# Altium PCB PCB.PcbDoc
Units mm, origin at the board's own origin, x right, y up, seen from the top; angles counter-clockwise.
Board outline 21 x 24 mm, 2 copper layers (Top Layer, Bottom Layer), stack 0.96 mm thick; 17 components, 13 nets, 56 pads, 22 vias.
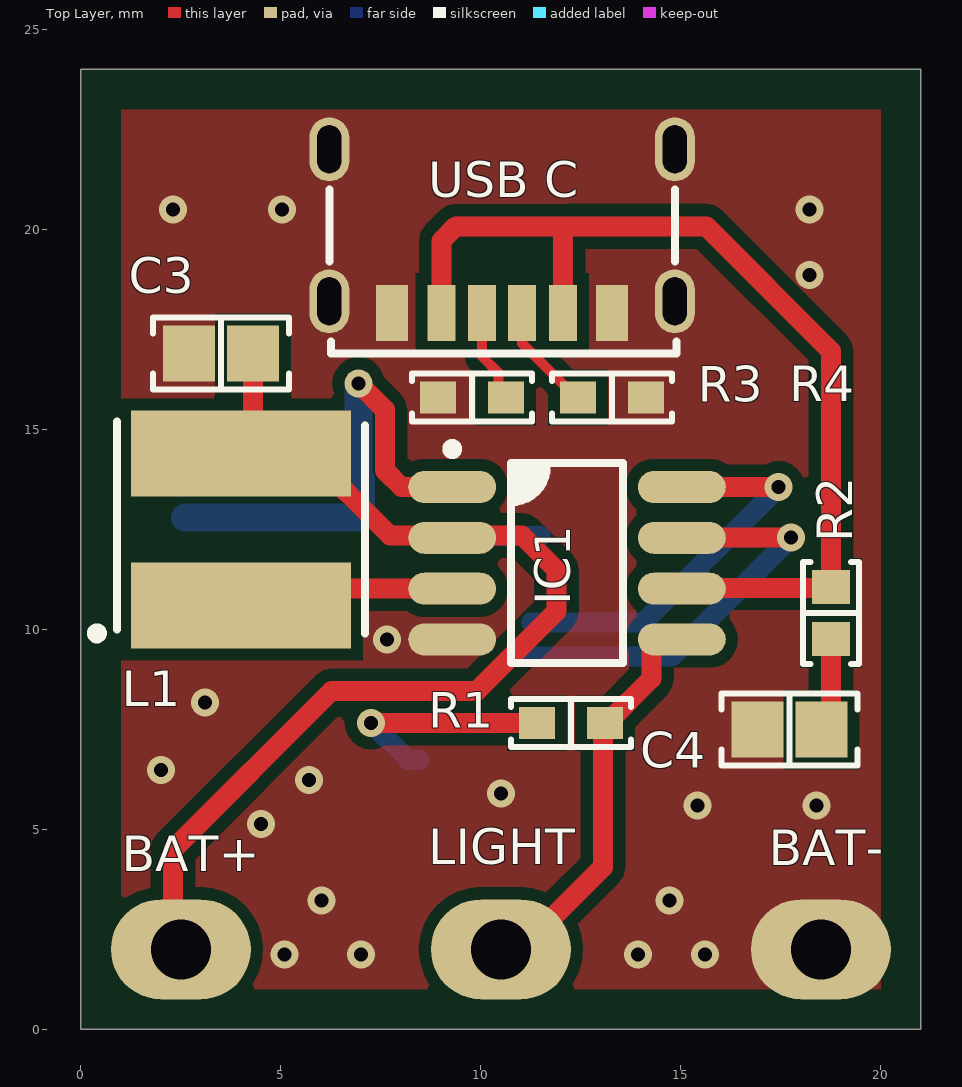
[diagram p0: Top Layer view]
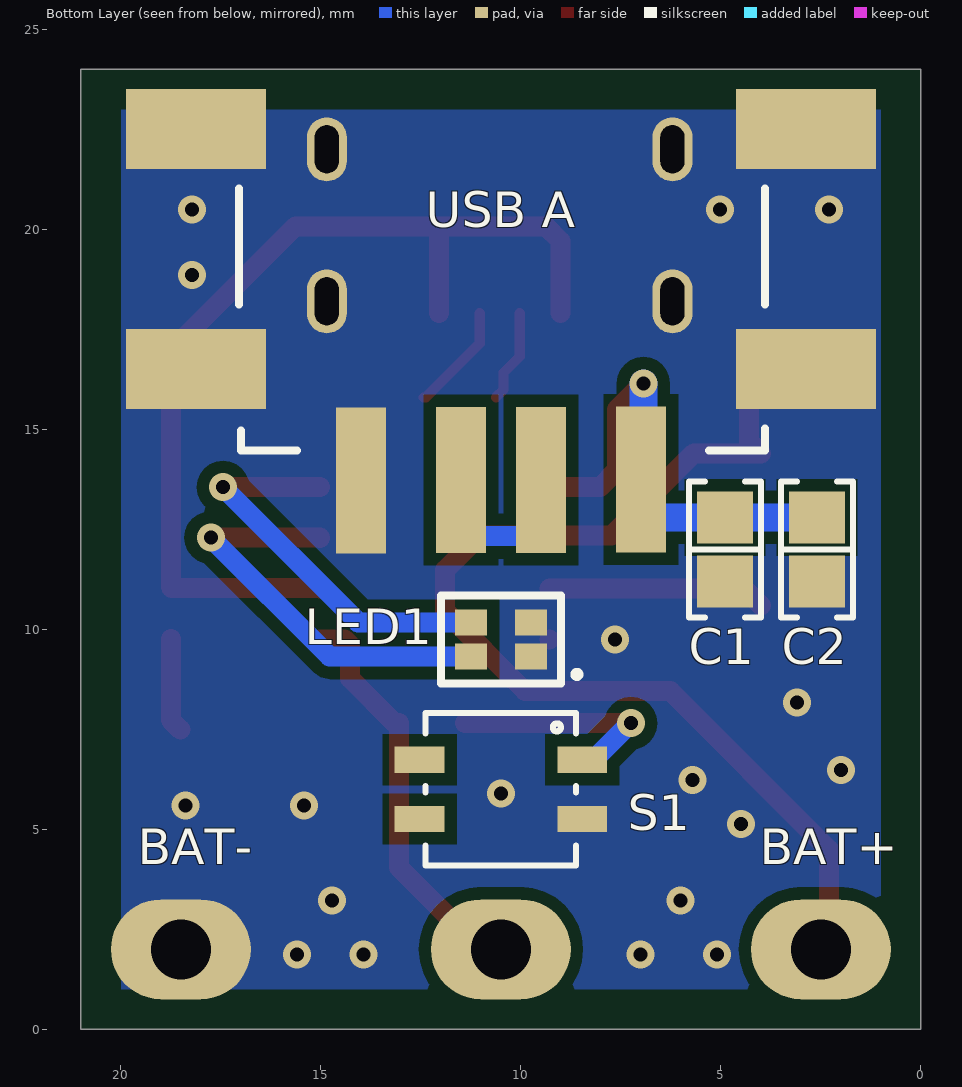
[diagram p1: Bottom Layer view, seen from below]
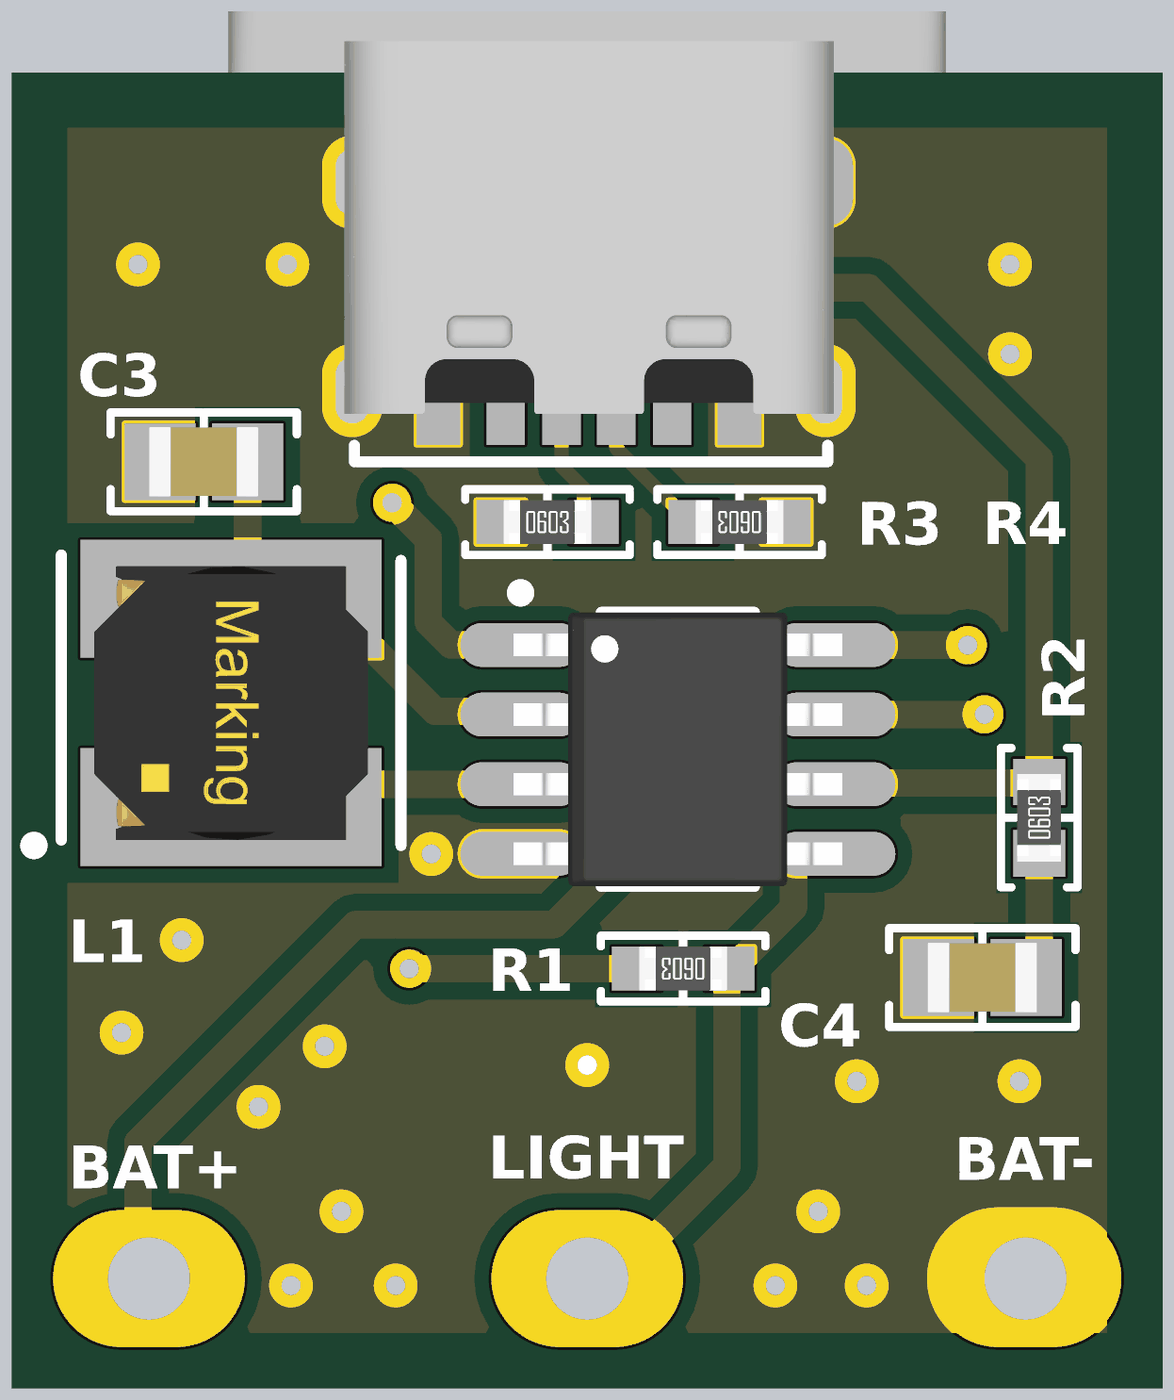
[diagram p2: 3D render of the assembled board from above, using the file's embedded part models]
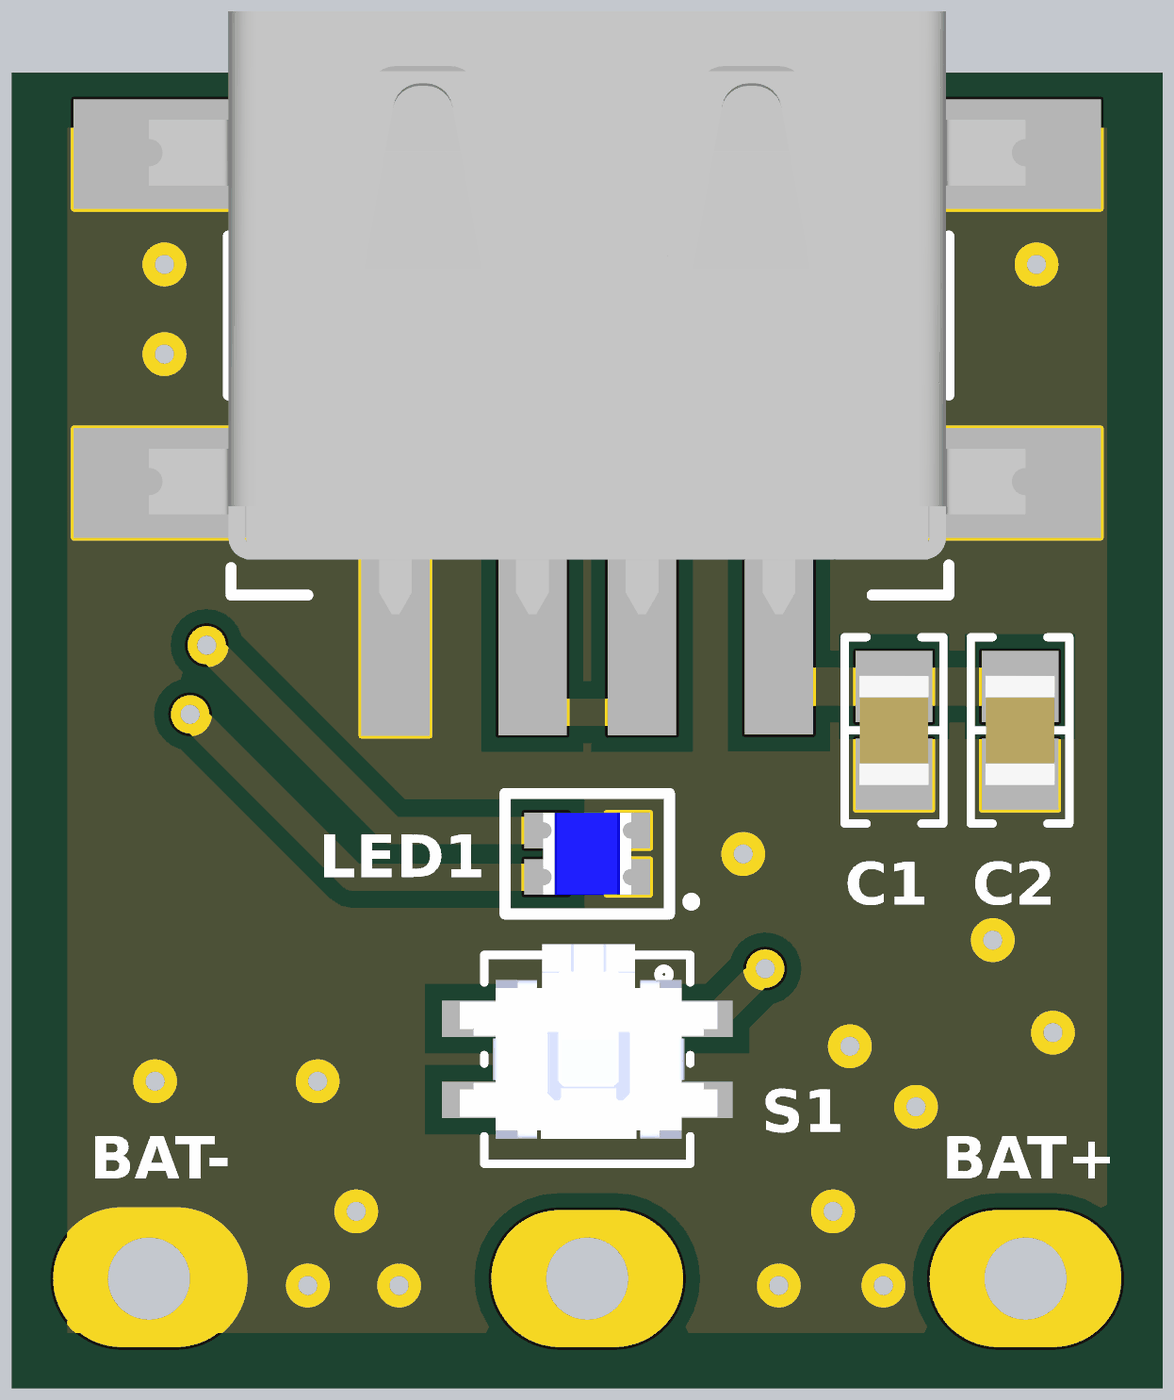
[diagram p3: 3D render of the assembled board from below, using the file's embedded part models]

## Layer stack, top to bottom
Top Solder: solder mask 0.02, Solder Resist, Dk 3.5
Top Layer: signal copper 0.03
Dielectric 1: dielectric 0.9, FR-4, Dk 4.8
Bottom Layer: signal copper 0.03
Bottom Solder: solder mask 0.02, Solder Resist, Dk 3.5

## Board outline
0,0 0,24 21,24 21,0

## Design rules (kind name [scope] priority, off if disabled: settings)
AcuteAngle [All] p1: minimum=6.00000000000000E+0001 checktracksonly=TRUE
AssemblyTestPointUsage [(not InNetClass('NOTESTPOINTS'))] p1: allowmultiple=TRUE
AssemblyTestPointUsage AssemblyTestPointUsageN [InNetClass('NOTESTPOINTS')] p2: valid=2 allowmultiple=TRUE
AssemblyTestpoint [All] p1: testpointundercomponent=TRUE minsize=0.8 maxsize=2 preferedsize=1 minholesize=0 maxholesize=0.35 preferedholesize=0 testpointgrid=1.27 usegrid=FALSE gridoriginx=87.5 gridoriginy=62.5 gridtolerance=0 allowsidetop=TRUE minspacing=2.54 // Zollner
BoardOutlineClearance BoardCopperOutlineClearance [(OnLayer('Top Layer') OR OnLayer('Bottom Layer') )] p1: gap=0.5 ignorepadtopadclearanceinfootprint=FALSE except(1: Poly-OutlineEdge Region-OutlineEdge; 1.5: SMDPad-OutlineEdge THPad-OutlineEdge)
Clearance PadToViaClearance [IsVia and not IsComponentVia vs IsPad] p1: gap=0.025 ignorepadtopadclearanceinfootprint=TRUE
Clearance "Clearance NOTSELV-SELV" [InNetClass('NOTSELV') vs NOT InNetClass('NOTSELV')] p2: gap=6 ignorepadtopadclearanceinfootprint=FALSE // according to previous calio PCB
Clearance "Clearance (FAB)" [All] p3: gap=0.203 ignorepadtopadclearanceinfootprint=TRUE except(0.305: Arc-Poly Track-Poly SMDPad-Poly THPad-Poly Via-Poly Fill-Poly Poly-Poly)
ComponentClearance ComponentClearance_NetTie [((ObjectKind = 'Component') And (ComponentType = 'Net Tie')) Or (Footprint = 'StarPoint') Or (Footprint like 'NetTieVia*')] p1: gap=-3.81 collisioncheckmode=3 verticalgap=-3.81 showdistances=FALSE
ComponentClearance [All] p2: gap=0.254 collisioncheckmode=3 verticalgap=0.254 showdistances=FALSE
DiffPairsRouting [All] p1: maxlimit=1.27 minlimit=0.203 mostfreqgap=0.203 toplayer_minwidth=0.152 toplayer_maxwidth=2.54 toplayer_prefwidth=0.254 bottomlayer_minwidth=0.152 bottomlayer_maxwidth=2.54 bottomlayer_prefwidth=0.254 maxuncoupledlength=12.7
FabricationTestPointUsage [All] p1: valid=2 allowmultiple=FALSE
FabricationTestpoint [All] p1: side=3 testpointundercomponent=TRUE minsize=1.016 maxsize=2.54 preferedsize=1.524 minholesize=0 maxholesize=1.016 preferedholesize=0.813 testpointgrid=0.025 allowsidetop=TRUE allowsidebottom=TRUE usegrid=FALSE gridtolerance=0
HoleSize [All] p1: absolutevalues=TRUE maxlimit=6.35 minlimit=0.3 maxpercent=80.000 minpercent=20.000 // Zollner
HoleToHoleClearance HoleToHoleClearance_NetTieVia [InPadClass('NetTieVias') vs InPadClass('NetTieVias')] p1: gap=0 allowstackedmicrovias=TRUE
HoleToHoleClearance [All] p2: gap=0.25 allowstackedmicrovias=TRUE // Zollner
MinimumAnnularRing [All] p1: minimumring=0.15 // PCBWAY
MinimumSolderMaskSliver [All] p1: minsoldermaskwidth=0.2 // Zollner
PlaneClearance PlaneClearance_1 [All] p1: clearance=0.508
PlaneConnect [All] p1: pad.planeconnectstyle=Relief pad.reliefexpansion=0.508 pad.reliefentries=4 pad.reliefconductorwidth=0.254 pad.reliefairgap=0.254 via.planeconnectstyle=Direct via.reliefexpansion=0.508 via.reliefentries=4 via.reliefconductorwidth=0.254 via.reliefairgap=0.254
PolygonConnect [All] p1: connectstyle=Direct reliefconductorwidth=0.254 reliefentries=4 polygonreliefangle="90 Angle" airgapwidth=0.254
RoutingVias [All] p1: holewidth=0.35 width=0.7 viastyle="Through Hole" minholewidth=0.3 minwidth=0.6 maxholewidth=1.27 maxwidth=1.27
SMDEntry [not IsTestpoint] p1: side=TRUE corner=TRUE anyangle=FALSE
SMDNeckDown [not IsTestpoint] p1: percent=90.000
SMDToCorner [All] p1: distance=10000
SMDToPlane [All] p1: distance=0
ShortCircuit [All vs not IsBoardCutoutRegion] p1: allowed=FALSE
SilkToSolderMaskClearance [IsPad] p1: minsilkscreentomaskgap=0.127 clearancetoexposedcopper=TRUE
SolderMaskExpansion [All] p1: expansion=0.05 // Zollner
SolderMaskExpansion SolderMaskExpansionToHoles [All] p2: expansion=0.1 soldermaskfromhole=TRUE // Zollner
UnRoutedNet [All] p1: checkbadconnections=TRUE
Width [All] p1: maxlimit=12.7 minlimit=0.203 preferedwidth=0.254
16 further rules are at their usual default settings.

## Components (designator, comment, footprint, x,y, rotation, side; value= is the part's Value field where it differs from the comment)
BAT+ "2.5MMx3.5MM" PAD_WITH_HOLE_2.5X3.5MM#1 2,2 r90 top locked (schematic designator J3)
BAT- "2.5MMx3.5MM" PAD_WITH_HOLE_2.5X3.5MM#2 19,2 r90 top locked (schematic designator J4)
C1 "10µF" "CAP 0805_2012" 4.9,12 r90 bottom
C2 "10µF" "CAP 0805_2012" 2.6,12 r90 bottom
C3 "10µF" "CAP 0805_2012" 3.5,16.9 r0 top
C4 "2.2µF" "CAP 0805_2012" 17.712,7.492 r0 top
IC1 "TP4333" "ALPHAOMEGA SO8 SOP-8L" 12.154,11.654 r0 top
L1 "1.5 uH" CD54 4,12.5 r270 top
LED1 "Bicolor 1615" "LED 0603 1615 BICOLOR" 10.5,9.75 r0 bottom
LIGHT "2.5MMx3.5MM" PAD_WITH_HOLE_2.5X3.5MM#3 10.5,2 r90 top locked (schematic designator J5)
R1 "10 kOhms" "YAGEO RES 0603_1608" 12.25,7.654 r180 top
R2 "1.5 Ohms" "RES 0603_1608" 18.75,10.409 r90 top
R3 "5.1 kOhms" "YAGEO RES 0603_1608" 9.775,15.8 r0 top
R4 "5.1 kOhms" "YAGEO RES 0603_1608" 13.28,15.8 r180 top
S1 "EVQ-P7A01P" EVQ-P7A01P 10.5,6 r0 bottom
"USB A" "USB A" "PCB - CONNECTOR - USB - YOURCEEAF10.0" 10.5,18.119 r0 bottom (schematic designator J2)
"USB C" "USB Type-C 6pin" USB_TYPE_C_6PIN 14.85,22 r180 top locked (schematic designator J1)

## Footprints (in the part's own frame and the unit in brackets; to place one, negate y for a bottom-side part, rotate by r counter-clockwise, add the part's x,y. Pads: shape width x height; smd on the part's side, far side on the other; paste and mask are expansions set on the pad)
"ALPHAOMEGA SO8 SOP-8L" [mm] "SOIC, 8-Leads, Body 4.90x3.90mm, Pitch 1.27mm, IPC Medium Density"
  oval 2.2x0.8 smd: 1(-2.87,1.905) 2(-2.87,0.635) 3(-2.87,-0.635) 4(-2.87,-1.905) 5(2.87,-1.905) 6(2.87,-0.635) 7(2.87,0.635) 8(2.87,1.905)
  silkscreen extent -2.99,-2.5 1.4,2.98, body extent -3,-2.5 3,2.5, height 1.75
"CAP 0805_2012" [mm] "Chip Capacitor, 2-Leads, Body 2.00x1.20mm, IPC Medium Density"
  rect 1.3x1.4 smd: 1(-0.8,0) 2(0.8,0)
  silkscreen extent -1.7,-0.9 1.7,0.9, body extent -1,-0.64 1,0.64, height 1.26
CD54 [mm] "SMD Power Inductor, 2-Leads, body 5.8x5.2mm"
  rect 2.15x5.5 smd: 1(1.9,0) 2(-1.9,0)
  silkscreen extent -2.7,-3.72 2.72,3.1, body extent -2.5,-2.5 2.5,2.5, height 4.03
EVQ-P7A01P [mil]
  rect 49x26 smd paste+0 mask+0: 2(-80,29.13) 2*(80,29.13) 3(-80,-29.13) 3*(80,-29.13)
  silkscreen extent -74,-75 74,75, body extent -94,-83 92,57, height 53
"LED 0603 1615 BICOLOR" [mm] "SMD SMT Light Emitting Diode 1.6*0.8*0.6MM"
  rect 0.8x0.65 smd mask+0.05: 1(-0.75,0.425) 2(0.75,0.425) 3(-0.75,-0.425) 4(0.75,-0.425)
  silkscreen extent -1.94,-1.1 1.5,1.1, body extent -0.8,-0.75 0.8,0.75, height 0.7
PAD_WITH_HOLE_2.5X3.5MM#1 [mm]
  rrect100% 2.5x3.5 hole 1.5: 1(0,-0.5)
PAD_WITH_HOLE_2.5X3.5MM#2 [mm]
  rrect100% 2.5x3.5 hole 1.5: 1(0,0.5)
PAD_WITH_HOLE_2.5X3.5MM#3 [mm]
  rrect100% 2.5x3.5 hole 1.5: 1(0,0)
"PCB - CONNECTOR - USB - YOURCEEAF10.0" [mm] "SMD USB Type A Female jack 4PIN"
  rect 1.25x3.65 smd: 1(-3.5,4.369) 2(-1,4.381) 3(1,4.381) 4(3.5,4.394)
  rect 3.5x2 smd: S(-7.625,-4.394) S(-7.625,1.606) S(7.625,-4.394) S(7.625,1.606)
  silkscreen extent -6.6,-2.9 6.55,3.65, body extent -8,-7 11.1,4, height 6.85
"RES 0603_1608" [mm] "Chip Resistor, 2-Leads, Body 1.60x0.80mm, IPC Medium Density"
  rect 0.85x0.95 smd: 1(-0.65,0) 2(0.65,0)
  silkscreen extent -1.27,-0.7 1.27,0.7, body extent -0.8,-0.4 0.8,0.4, height 0.45
USB_TYPE_C_6PIN [mm] "Power only USB Type-C 6pin"
  rect 0.7x1.4 smd: A5(3.82,4.09) A9(5.84,4.09) B5(4.82,4.09) B9(2.8,4.09)
  rect 0.8x1.4 smd: A12(7.07,4.09) B12(1.57,4.09)
  oval 1x1.6 hole 1.2 slot 0.6 at 0 deg: S(0,3.8) S(0,0) S(8.64,0) S(8.64,3.8)
  oval 1x1.6 smd: S(0,0)
  silkscreen extent -0.04,1 8.64,5.1, body extent -0.15,-2.57 8.79,4.23, height 3.21
"YAGEO RES 0603_1608" [mm] "Chip Resistor, 2-Leads, Body 1.60x0.80mm"
  rect 0.9x0.8 smd: 1(-0.85,0) 2(0.85,0)
  silkscreen extent -1.5,-0.6 1.5,0.6, body extent -0.8,-0.4 0.8,0.4, height 0.45

## Part data
BAT+ BAT- LIGHT: library part PAD_WITH_HOLE_2.5X3.5MM, "High: 3mm Length: 3.5mm"
C1 C2 C3: library part 0805ZD106KAT4A, "CAP CER 10UF 10V X5R 0805", Device Package="0805 (2012 Metric)", Manufacturer="AVX Corporation", Operating Temperature="-55°C ~ 85°C", Supplier Part Number 1=478-10579-1-ND, Temperature Coefficient=X5R, Tolerance=±10%, Voltage - Rated=10V, Applications="General Purpose", Capacitance=10µF, ComponentLink1Description=Datasheet, ComponentLink1URL=http://datasheets.avx.com/cx5r.pdf, ComponentLink2Description="DigiKey Link", ComponentLink2URL=http://digikey.com/product-detail/en/avx-corporation/0805ZD106KAT4A/478-10579-1-ND/6797452, id=487, LastUpdated=2020-09-02T01:04:37.257, Lifecycle Status=Active, Minimum Order=1, Mounting Type="Surface Mount, MLCC", Package / Case="0805 (2012 Metric)", Packaging=TapeAndReel, PartId=5023, Part Number=0805ZD106KAT4A, Part Status=Active, Price=0.12, Series=-, Size / Dimension="0.079\" L x 0.049\" W (2.01mm x 1.25mm)", Supplier 1=DigiKey, Thickness (Max)="0.055\" (1.40mm)"
C4: library part 0805YD225KAT2A, "CAP CER 2.2UF 16V X5R 0805", Device Package="0805 (2012 Metric)", Manufacturer="AVX Corporation", Operating Temperature="-55°C ~ 85°C", Supplier Part Number 1=478-2580-1-ND, Temperature Coefficient=X5R, Tolerance=±10%, Voltage - Rated=16V, Applications="General Purpose", Capacitance=2.2µF, ComponentLink1Description=Datasheet, ComponentLink1URL=http://datasheets.avx.com/cx5r.pdf, ComponentLink2Description="DigiKey Link", ComponentLink2URL=http://digikey.com/product-detail/en/avx-corporation/0805YD225KAT2A/478-2580-1-ND/717525, id=190, LastUpdated=2020-09-02T01:04:40.080, Lifecycle Status=Active, Minimum Order=1, Mounting Type="Surface Mount, MLCC", Package / Case="0805 (2012 Metric)", Packaging=TapeAndReel, PartId=3362, Part Number=0805YD225KAT2A, Part Status=Active, Price=0.16, Series=-, Size / Dimension="0.079\" L x 0.049\" W (2.01mm x 1.25mm)", Supplier 1=DigiKey, Thickness (Max)="0.055\" (1.40mm)"
IC1: library part "IC TP4333 8SOIC", "1A Synchronous mobile power solution 8-SOIC"
L1: library part Inductor, "CD54 SMT Inductor"
LED1: library part "LED 0603 1615", "SMD SMT Light Emitting Diode 1.6*0.8*0.6MM", ComponentLink1Description=Aliexpress, ComponentLink1URL=https://www.aliexpress.com/item/4001174921701.html?spm=a2g0o.order_list.0.0.12d31802vfu5Sp
R1: library part RC0603FR-1310KP, "RES 10K OHM 1% 1/10W 0603", Device Package="0603 (1608 Metric)", Manufacturer=Yageo, Operating Temperature="-55°C ~ 155°C", Power (Watts)="0.1W, 1/10W", Ratings="7C1 RoHS w/out Exemption (100% Pb-Free)", Supplier Device Package=0603, Supplier Part Number 1=13-RC0603FR-1310KPCT-ND, Temperature Coefficient=±100ppm/°C, Tolerance=±1%, ComponentLink1Description=Datasheet, ComponentLink1URL=https://www.yageo.com/upload/media/product/productsearch/datasheet/rchip/PYu-RC_51_RoHS_P_5.pdf, ComponentLink2Description="DigiKey Link", ComponentLink2URL=https://www.digikey.com/en/products/detail/yageo/RC0603FR-1310KP/17014313, Composition="Thick Film", Height - Seated (Max)="0.022\" (0.55mm)", id=22702, LastUpdated=2024-07-25T09:18:59.747, Lifecycle Status=Active, Minimum Order=1, Number Of Terminations=2, Package / Case="0603 (1608 Metric)", Packaging=CutTape, PartId=87293, Part Number=RC0603FR-1310KP, Price=0.01, Resistance="10 kOhms", Series=RC_P, Size / Dimension="0.063\" L x 0.031\" W (1.60mm x 0.80mm)", Supplier 1=DigiKey
R2: library part RC0603FR-131R5L, "RES 1.5 OHM 1% 1/10W 0603", Device Package="0603 (1608 Metric)", Manufacturer=Yageo, Operating Temperature="-55°C ~ 155°C", Power (Watts)="0.1W, 1/10W", Supplier Device Package=0603, Supplier Part Number 1=13-RC0603FR-131R5LCT-ND, Temperature Coefficient=±200ppm/°C, Tolerance=±1%, ComponentLink1Description=Datasheet, ComponentLink1URL=https://www.yageo.com/upload/media/product/productsearch/datasheet/rchip/PYu-RC_Group_51_RoHS_L_12.pdf, ComponentLink2Description="DigiKey Link", ComponentLink2URL=https://www.digikey.com/en/products/detail/yageo/RC0603FR-131R5L/17024881, Composition="Thick Film", Features="Moisture Resistant", Height - Seated (Max)="0.022\" (0.55mm)", id=20062, LastUpdated=2023-06-29T19:30:21.450, Lifecycle Status=Active, Minimum Order=1, Number Of Terminations=2, Package / Case="0603 (1608 Metric)", Packaging=TapeAndReel, PartId=78254, Part Number=RC0603FR-131R5L, Part Status=Active, Price=0.01, Resistance="1.5 Ohms", Series=RC_L, Size / Dimension="0.063\" L x 0.031\" W (1.60mm x 0.80mm)", Supplier 1=DigiKey
R3 R4: library part AR0603JR-075K1L, "RES 5.1K OHM 5% 1/10W 0603", Device Package="0603 (1608 Metric)", Manufacturer=Yageo, Operating Temperature="-55°C ~ 155°C", Power (Watts)="0.1W, 1/10W", Supplier Device Package=0603, Supplier Part Number 1=13-AR0603JR-075K1LCT-ND, Temperature Coefficient=±100ppm/°C, Tolerance=±5%, ComponentLink1Description=Datasheet, ComponentLink1URL=https://www.yageo.com/upload/media/product/app/datasheet/rchip/pyu-ar_51_rohs_l.pdf, ComponentLink2Description="DigiKey Link", ComponentLink2URL=https://www.digikey.com/en/products/detail/yageo/AR0603JR-075K1L/16992068, Composition="Thick Film", Features="Moisture Resistant", Height - Seated (Max)="0.022\" (0.55mm)", id=22469, LastUpdated=2024-07-25T09:18:57.220, Lifecycle Status=Active, Minimum Order=1, Number Of Terminations=2, Package / Case="0603 (1608 Metric)", Packaging=TapeAndReel, PartId=87060, Part Number=AR0603JR-075K1L, Price=0.03, Resistance="5.1 kOhms", Series=AR, Size / Dimension="0.063\" L x 0.031\" W (1.60mm x 0.80mm)", Supplier 1=DigiKey
S1: "SWITCH TACTILE SPST-NO 0.05A 12V", Contact Rating @ Voltage="0.05A @ 12VDC", Illumination Type, Color=-, Manufacturer="Panasonic Electronic Components", Operating Force=220gf, Operating Temperature="-20°C ~ 70°C", Supplier Part Number 1=P16763CT-ND, Actuator Height Off Pcb, Vertical=-, Actuator Length, Right Angle=-, Actuator Orientation="Side Actuated", Actuator Type="Rectangular Button", Circuit=SPST-NO, ComponentLink1Description=Datasheet, ComponentLink1URL=https://api.pim.na.industrial.panasonic.com/file_stream/main/fileversion/245500, ComponentLink2Description="Product Photos", ComponentLink2URL="https://mm.digikey.com/Volume0/opasdata/d220001/medias/images/2518/EVQ-P7A01K, EVQ-P7B01K, EVQ-P7J01K, EVQ-P7K01K.jpg", ComponentLink3Description="Product Training Modules", ComponentLink3URL=https://www.digikey.com/ptm/p/panasonic-electronic-components/tact-switches, ComponentLink4Description="EDA Models", ComponentLink4URL=https://www.snapeda.com/parts/EVQ-P7A01P/Panasonic%20Electronic/view-part/?ref=digikey, ComponentLink5Description="EDA Models", ComponentLink5URL=https://app.ultralibrarian.com/details/61252631-757A-11EC-9033-0A34D6323D74/Panasonic/EVQ-P7A01P?ref=digikey, ComponentLink6Description="360 Product Photos", ComponentLink6URL=https://media.digikey.com/360Images/Panasonic/P16763CT-ND/HTML5Viewer.html, Features=-, id=41, Illumination=Non-Illuminated, Illumination Voltage (Nominal)=-, Ingress Protection=-, LastUpdated=2023-10-19T15:20:45.1615887, Lifecycle Status=Active, Minimum Order=1, Mounting Type="Surface Mount, Right Angle", Outline="4.70mm x 2.90mm", Packaging="Cut Tape (CT)", Part Number=EVQ-P7A01P, Part Status=Active, Price=0.28, Series=EVQP7, Supplier 1=DigiKey, Switch Function=Off-Mom, Termination Style="Gull Wing"
"USB A": library part "USB 2.0 TYPE A"
"USB C": library part USB_3_TYPE_C, "Power only USB Type-C 3.0"

## Via types
v1: diameter 0.7, hole 0.35, Top Layer to Bottom Layer, 22 vias

## Nets (pads, with @x,y where several pads share a name; then routed paths per layer and width w, separated by ;. In a path a pad name is that pad's centre, name@x,y a point inside that pad or via, vN(x,y) a via of type N, cw(c..) or ccw(c..) an arc to the next point about the centre after c; other vN are vias at no path point)
BAT: BAT+.1 C3.2 IC1.2 L1.2 | length 27.4
  Top Layer w0.5: BAT+.1@2,2 2.3,2.3 2.3,4.491 6.266,8.457 9.899,8.457 11.893,10.451 11.893,11.483 11.029,12.346 7.729,12.346 5.675,14.4 L1.2 4.3,14.7 C3.2
CHARGE_LED: IC1.8 LED1.4 | length 10
  Top Layer w0.5: IC1.8 15.026,13.557 17.443,13.557 v1(17.446,13.554)
  Bottom Layer w0.5: LED1.4 14.067,10.175 v1(17.446,13.554)
DISCHARGE_LED: IC1.7 LED1.2 | length 10.5
  Top Layer w0.5: IC1.7@15.028,12.293 IC1.7 15.026,12.291 17.748,12.291 v1(17.75,12.293)
  Bottom Layer w0.5: LED1.2 14.782,9.325 v1(17.75,12.293)
FLASHLIGHT_BUTTON: IC1.5 LIGHT.1 R1.1 | length 10.3
  Top Layer w0.5: LIGHT.1 11,2 13.05,4.05 13.05,7.654 13.15,7.654 14.267,8.77 14.267,9.61 14.405,9.749 IC1.5
GND: "USB A.4" "USB A.S" "USB C.A12" "USB C.B12" "USB C.S" BAT-.1 C1.1 C2.1 C3.1 C4.1 IC1.4 LED1.1 LED1.3 R3.1 R4.1 S1.2 | length 0
  Top Layer w0.5: v1(7.653,9.745) v1@7.655,9.747 ; IC1.4@9.282,9.747 IC1.4
  other v1: 5.093,1.873 7.004,1.873 13.934,1.873 15.6,1.873 6.013,3.226 14.716,3.226 4.5,5.133 15.42,5.6 18.388,5.6 10.5,5.895 5.707,6.238 2,6.487 3.098,8.174 18.217,18.864 2.3,20.5 5.027,20.5 18.217,20.5
IN_5V: "USB C.A9" "USB C.B9" IC1.6 R2.2 | length 24.8
  Top Layer w0.5: 9.01,17.91 9.01,19.71 9.375,20.075 12.138,20.075 ; 12.05,17.91 12.05,19.987 12.138,20.075 ; IC1.6 15.044,11.039 18.73,11.039 R2.2 18.75,16.961 15.636,20.075 12.138,20.075
NetC4_2: C4.2 R2.1 | length 2.4
  Top Layer w0.5: C4.2 18.75,7.729 R2.1
NetIC1_3: IC1.3 L1.1 | length 5.5
  Top Layer w0.5: L1.1 4.419,11.019 IC1.3
NetJ1_A5: "USB C.A5" R4.2 | length 2.7
  Top Layer w0.254: 11.03,17.91 11.03,17.15 12.38,15.8 R4.2
NetJ1_B5: "USB C.B5" R3.2 | length 2.4
  Top Layer w0.254: 10.03,17.91 10.03,16.82 10.436,16.414 10.436,15.989 R3.2
NetJ2_2: "USB A.2" "USB A.3" | length 2
  Bottom Layer w0.5: 9.5,12.33 11.5,12.33
NetR1_2: R1.2 S1.3 | length 5.7
  Top Layer w0.5: v1(7.251,7.654) R1.2
  Bottom Layer w0.5: v1(7.251,7.654) 7.262,7.654 8.176,6.74 S1.3
OUT_5V: "USB A.1" C1.2 C2.2 IC1.1 | length 12
  Top Layer w0.5: v1(6.938,16.153) 7.6,15.491 7.6,13.975 8.016,13.559 IC1.1
  Bottom Layer w0.7: C2.2 C1.2 6.9,12.8 7,12.9 7,13.75 6.938,13.812 v1(6.938,16.153)
pads on no net: S1.2* S1.3*

## Polygon pours and split planes (outlines as drawn)
GND on Top Layer "GND_L01_P002" (solid, remove dead copper, pour order 2): -0.5,0 -0.5,24 21.5,24 21.5,0
GND on Bottom Layer "GND_L02_P000" (solid, remove dead copper, pour order 0): -0.5,0 -0.5,24 21.5,24 21.5,0

## Silkscreen, mask and mechanical layers (free items; w line width, h text height)
Bottom Overlay:
  text "BAT+" at 4.025,3.825 h1.52
  text "BAT-" at 19.578,3.825 h1.52
Board outline:
  the board outline again, w0.2

## Dimensions
21,0 to 21,24 on Board outline
0,0 to 21,0 on Board outline